# Altium PCB psu_temp.PcbDoc
Units mm, origin at the board's own origin, x right, y up, seen from the top; angles counter-clockwise.
Board outline 150 x 100 mm, 4 copper layers (Top Layer, GND, Power, Bottom Layer), stack 1.57 mm thick; 12 components, 182 nets, 28 pads, 0 vias.
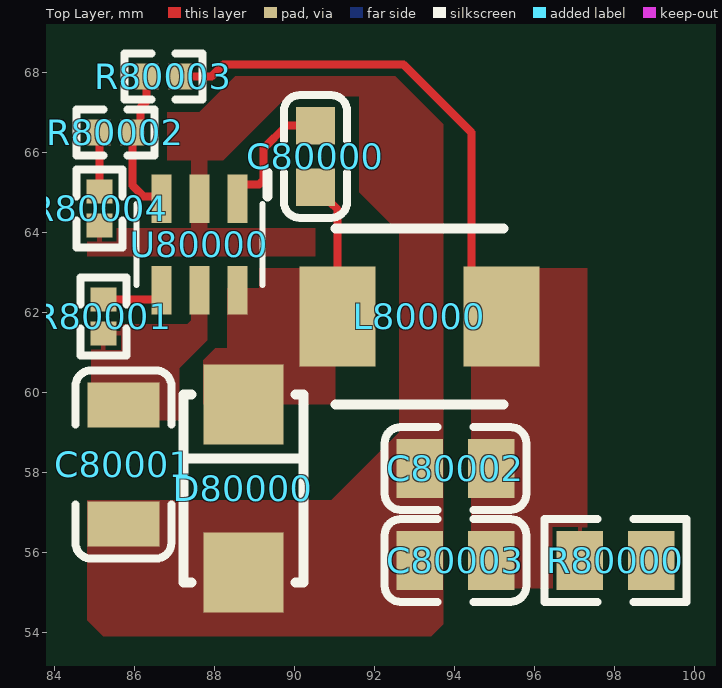
[diagram p0: Top Layer view]
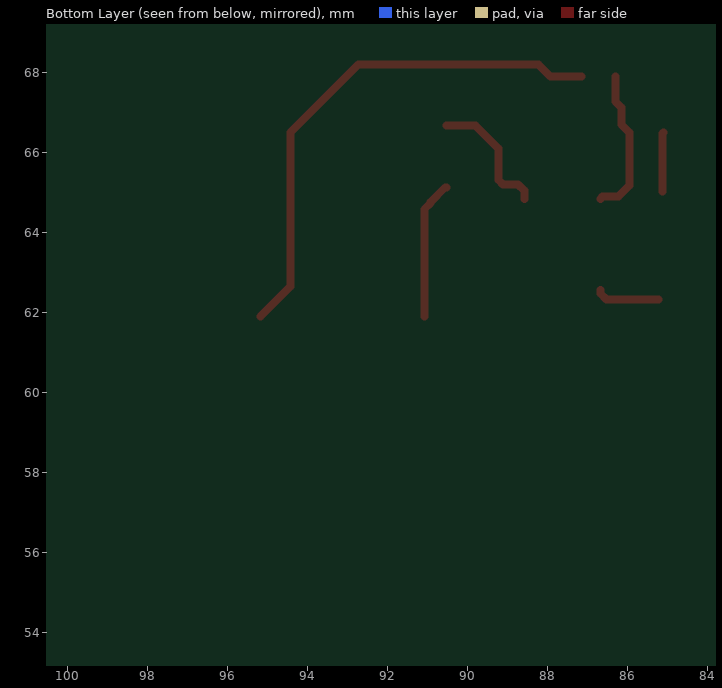
[diagram p1: Bottom Layer view, seen from below]
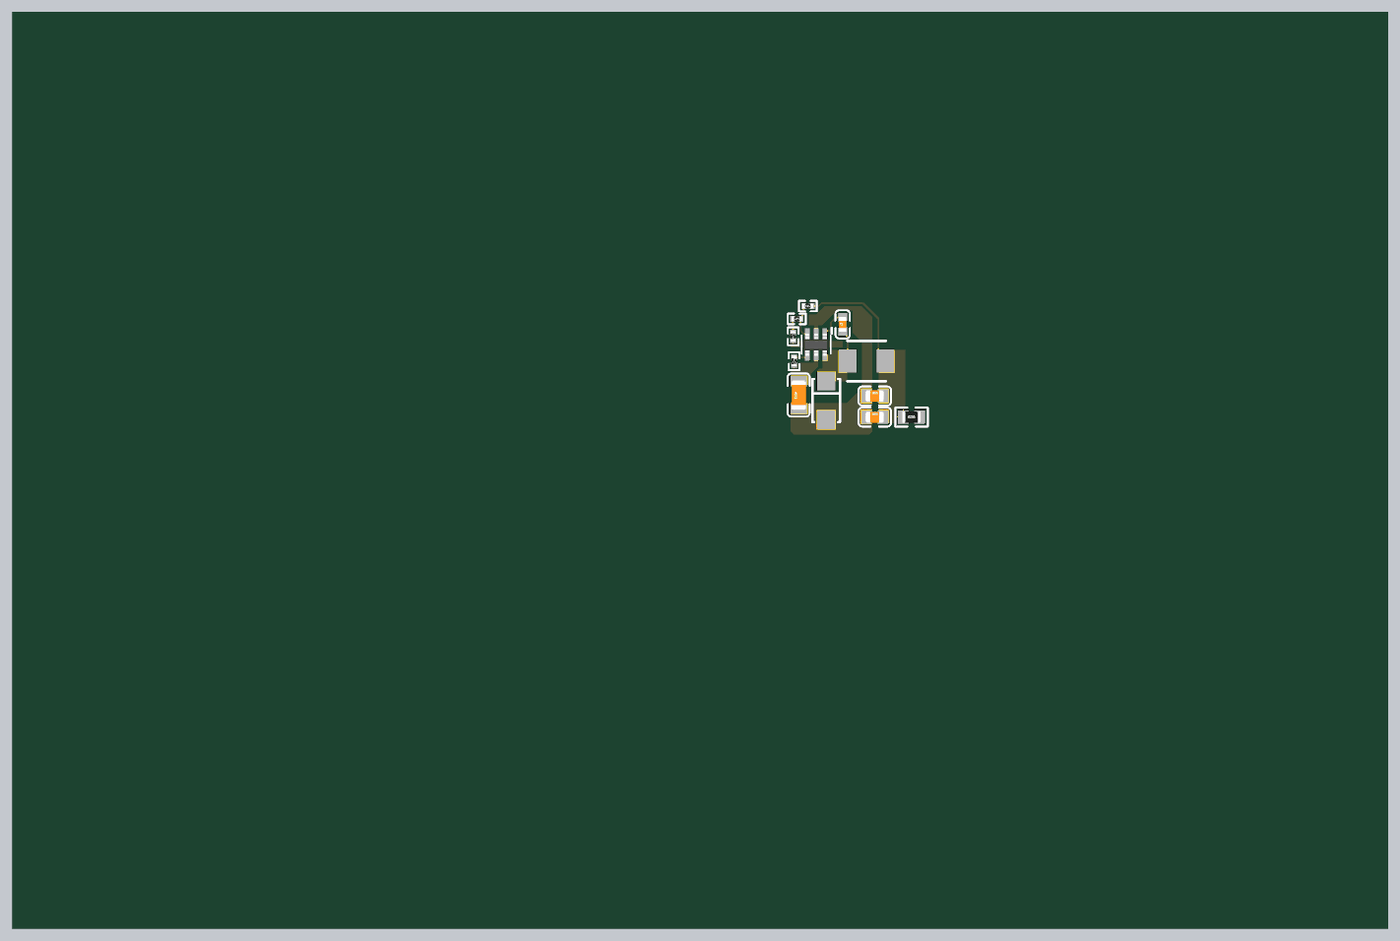
[diagram p2: 3D render of the assembled board from above, using the file's embedded part models]

## Layer stack, top to bottom
Top Solder: solder mask 0.0127, Solder Resist, Dk 3.8
Top Layer: signal copper 0.035
Dielectric 1: prepreg 0.1, 2313, Dk 4.05
GND: signal copper 0.0175
Core: core 1.265, FR-4, Dk 4.5
Power: signal copper 0.0175
Dielectric 2: prepreg 0.1, 2313, Dk 4.05
Bottom Layer: signal copper 0.035
Bottom Solder: solder mask 0.0127, Solder Resist, Dk 3.8

## Board outline
0,0 150,0 150,100 0,100

## Design rules (kind name [scope] priority, off if disabled: settings)
BoardOutlineClearance [All] p1: gap=0.2 ignorepadtopadclearanceinfootprint=FALSE
Clearance [All] p1: gap=0.102 ignorepadtopadclearanceinfootprint=FALSE except(0.127: Arc-Via Track-Via SMDPad-Via THPad-Via Via-Via Via-Fill Via-Poly Via-Region Via-Text; 0.25: Arc-Hole Track-Hole SMDPad-Hole THPad-Hole Via-Hole Fill-Hole Poly-Hole Region-Hole Text-Hole)
ComponentClearance [All] p1: gap=0.102 collisioncheckmode=3 verticalgap=0.102 showdistances=TRUE
DiffPairsRouting [All] p1: maxlimit=0.102 minlimit=0.102 mostfreqgap=0.102 toplayer_minwidth=0.102 toplayer_maxwidth=1816.048 toplayer_prefwidth=0.102 midlayer1_minwidth=0.102 midlayer1_maxwidth=1816.048 midlayer1_prefwidth=0.102 midlayer2_minwidth=0.102 midlayer2_maxwidth=1816.048 midlayer2_prefwidth=0.102 bottomlayer_minwidth=0.102 bottomlayer_maxwidth=1816.048 bottomlayer_prefwidth=0.102 maxuncoupledlength=12.7
Height [All] p1: minheight=0 maxheight=1816.048 prefheight=12.7
HoleSize [All] p1: absolutevalues=TRUE maxlimit=6.3 minlimit=0.2 maxpercent=80.000 minpercent=20.000
HoleToHoleClearance [All] p1: gap=0.25 allowstackedmicrovias=FALSE
MinimumAnnularRing [All] p1: minimumring=0.076
MinimumSolderMaskSliver [All] p1: minsoldermaskwidth=0
PlaneClearance [All] p1: clearance=0.102
PlaneConnect PlaneConnectPowerPads [InPadClass('PowerPads')] p1: planeconnectstyle=Direct reliefexpansion=0.508 reliefentries=4 reliefconductorwidth=0.254 reliefairgap=0.254
PlaneConnect [All] p2: pad.planeconnectstyle=Relief pad.reliefexpansion=0.3 pad.reliefentries=4 pad.reliefconductorwidth=0.102 pad.reliefairgap=0.102 via.planeconnectstyle=Direct via.reliefexpansion=0.3 via.reliefentries=4 via.reliefconductorwidth=0.127 via.reliefairgap=0.127
PolygonConnect PolygonConnectPowerPads [All vs (InPadClass('PowerPads'))] p1: connectstyle=Direct reliefconductorwidth=0.254 reliefentries=4 polygonreliefangle="90 Angle" airgapwidth=0.254
PolygonConnect [All] p2: thpad.connectstyle=Relief thpad.reliefconductorwidth=0.102 thpad.reliefentries=4 thpad.polygonreliefangle="90 Angle" thpad.airgapwidth=0.102 smdpad.connectstyle=Relief smdpad.reliefconductorwidth=0.102 smdpad.reliefentries=4 smdpad.polygonreliefangle="90 Angle" smdpad.airgapwidth=0.102 via.connectstyle=Direct via.reliefconductorwidth=0.127 via.reliefentries=4 via.polygonreliefangle="90 Angle" via.airgapwidth=0.127
RoutingVias [All] p1: holewidth=0.2 width=0.45 viastyle="Through Hole" minholewidth=0.2 minwidth=0.45 maxholewidth=6.3 maxwidth=6.55
SilkToSilkClearance [All] p1: silktosilkclearance=0
SilkToSolderMaskClearance [IsPad] p1: minsilkscreentomaskgap=0.102 clearancetoexposedcopper=TRUE
SolderMaskExpansion [All] p1: expansion=0.075 istentingtop=FALSE
Width [All] p1: maxlimit=1816.048 minlimit=0.102 preferedwidth=0.102
20 further rules are at their usual default settings.

## Classes and differential pairs
pad class PowerPads: C80001-1 C80001-2 C80002-1 C80002-2 C80003-1 C80003-2 D80000-1 D80000-2 L80000-1 L80000-2 U80000-2 U80000-5 U80000-6
component class "[10] - Isolation": U2

## Components (designator, comment, footprint, x,y, rotation, side; value= is the part's Value field where it differs from the comment)
C80000 "100nF (104) 10% 50V" 0603_C 90.525,65.9 r90 top
C80001 "4.7uF (475) 10% 50V" 1206_C 85.725,58.2 r90 top
C80002 "10uF (106) 10% 25V" 0805_C 94.025,58.1 r0 top
C80003 "10uF (106) 10% 25V" 0805_C 94.025,55.8 r0 top
D80000 "SS54" SMA(DO-214AC)_S1 88.725,57.6 r270 top
L80000 "MWSA0518S-6R8MT" MWSA0518 93.125,61.9 r0 top value=6.8uH
R80000 "0Ω (0R0) ±1%" 0805_R 98.025,55.8 r0 top
R80001 "100KΩ (1003) ±1%" 0402_R 85.225,61.9 r270 top
R80002 "3.3KΩ (3301) ±1%" 0402_R 85.525,66.5 r180 top
R80003 "49.9KΩ (4992) ±1%" 0402_R 86.725,67.9 r0 top
R80004 "100KΩ (1003) ±1%" 0402_R 85.125,64.6 r90 top
U80000 "STEP-DOWN CONVERTER" *TSOT-23_S6 87.625,63.7 r270 top

## Footprints (in the part's own frame and the unit in brackets; to place one, negate y for a bottom-side part, rotate by r counter-clockwise, add the part's x,y. Pads: shape width x height; smd on the part's side, far side on the other; paste and mask are expansions set on the pad)
0402_R [mm]
  rect 0.6x0.65 smd mask+0.051: 1(-0.425,0) 2(0.425,0)
  silkscreen extent -0.97,-0.58 0.97,0.58, body extent -0.57,-0.27 0.58,0.28, height 0.41
0603_C [mm]
  rect 0.93x0.98 smd: 1(-0.77,0) 2(0.77,0)
  silkscreen extent -1.53,-0.79 1.54,0.79, body extent -0.8,-0.4 0.8,0.4, height 0.3
0805_C [mm]
  rect 1.16x1.47 smd: 1(-0.89,0) 2(0.89,0)
  silkscreen extent -1.77,-1.04 1.77,1.04, body extent -1,-0.62 1,0.63, height 0.77
0805_R [mm]
  rect 1.16x1.47 smd: 1(-0.89,0) 2(0.89,0)
  silkscreen extent -1.77,-1.04 1.77,1.03, body extent -1,-0.62 1,0.63, height 0.49
1206_C [mm]
  rect 1.13x1.8 smd: 1(-1.49,0) 2(1.49,0)
  silkscreen extent -2.36,-1.2 2.35,1.2, body extent -1.6,-0.81 1.6,0.79, height 1
*TSOT-23_S6 [mil]
  rect 48x20 smd: 1(-45,37.4) 2(-45,0) 3(-45,-37.4) 4(45,-37.4) 5(45,0) 6(45,37.4)
  silkscreen extent -71,-62 40,67, body extent -47,-55 48,55, height 43
MWSA0518 [mm]
  rect 1.9x2.5 smd: 1(-2.05,0) 2(2.05,0)
  silkscreen extent -2.1,-2.2 2.1,2.2, body extent -2.1,-2.2 2.1,2.2, height 1.8
SMA(DO-214AC)_S1 [mm]
  rect 2x2 smd: 1(2.1,0) 2(-2.1,0)
  silkscreen extent -2.35,-1.5 2.35,1.5

## Part data
C80000: library part "0603 100nF (104) 10% 50V", "贴片电容", Package=0603, SuppliersPartNumber=C14663, ComponentLink1Description=供应商链接, ComponentLink1URL=http://www.szlcsc.com/product/details_15331.html, Supplier=LC
C80001: library part "1206 4.7uF (475) 10% 50V", "贴片电容", Package=1206, SuppliersPartNumber=C29823, ComponentLink1Description=供应商链接, ComponentLink1URL=http://www.szlcsc.com/product/details_30577.html, Supplier=LC
C80002 C80003: library part "0805 10uF (106) 10% 25V", "贴片电容", Package=0805, SuppliersPartNumber=C15850, ComponentLink1Description=供应商链接, ComponentLink1URL=http://www.szlcsc.com/product/details_16532.html, Supplier=LC
D80000: library part "SMA(DO-214AC) SS54", "二极管", Package=SMA(DO-214AC), SuppliersPartNumber=C22452, ComponentLink1Description=供应商链接, ComponentLink1URL=http://www.szlcsc.com/product/details_23178.html, Supplier=LC
L80000: "POWER INDUCTORS SMD,5.2X5.4X1.8MM ROHS", Current Rating=5.0A, Package=5.2X5.4X1.8MM, SuppliersPartNumber=C408348, Supplier=LC
R80000: library part "0805 0Ω (0R0) 1%", "贴片电阻", Package=0805, SuppliersPartNumber=C17477, ComponentLink1Description=供应商链接, ComponentLink1URL=http://www.szlcsc.com/product/details_18165.html, Supplier=LC
R80001 R80004: library part "0402 100KΩ (1003) 1%", "贴片电阻", Package=0402, SuppliersPartNumber=C25741, ComponentLink1Description=供应商链接, ComponentLink1URL=http://www.szlcsc.com/product/details_26484.html, Supplier=LC
R80002: library part "0402 3.3KΩ (3301) 1%", "贴片电阻", Package=0402, SuppliersPartNumber=C25890, ComponentLink1Description=供应商链接, ComponentLink1URL=http://www.szlcsc.com/product/details_26633.html, Supplier=LC
R80003: library part "0402 49.9KΩ (4992) 1%", "贴片电阻", Package=0402, SuppliersPartNumber=C25897, ComponentLink1Description=供应商链接, ComponentLink1URL=http://www.szlcsc.com/product/details_26640.html, Supplier=LC
U80000: library part MP2359, "1.2A, 24V, 1.4MHz STEP-DOWN CONVERTER IN A TSOT23-6", SuppliersPartNumber=C14259

## Nets (pads, with @x,y where several pads share a name; then routed paths per layer and width w, separated by ;. In a path a pad name is that pad's centre, name@x,y a point inside that pad or via, vN(x,y) a via of type N, cw(c..) or ccw(c..) an arc to the next point about the centre after c; other vN are vias at no path point)
+1.2V: R80000.2
+3V3A: 
+3V3A_ISO: 
+3V3D: 
+3V3D_ISO: 
+VREF: 
+Vsup: C80001.2 R80001.2 U80000.5
ACT_LED: 
ADC-VCM: 
ARM_nRESET: 
FL_CLK: 
FL_MISO: 
FL_MOSI: 
FL_nCS: 
FPGA_Config_CCLK: 
FPGA_Config_INIT_B: 
FPGA_Config_M0: 
FPGA_Config_M1: 
GND: C80001.1 C80002.1 C80003.1 D80000.1 R80004.1 U80000.2
GND_ISO: 
GPS_PPS_Out: 
GPS_Serial_RX: 
GPS_Serial_TX: 
INPUT_V+: 
Line-L1: 
Line-L2: 
Line-L3: 
Line-Neu: 
LNK_LED: 
NetC100_2: 
NetC300_2: 
NetC301_2: 
NetC302_2: 
NetC303_2: 
NetC400_2: 
NetC401_1: 
NetC402_2: 
NetC403_1: 
NetC404_2: 
NetC405_1: 
NetC406_2: 
NetC407_1: 
NetC505_2: 
NetC512_2: 
NetC515_2: 
NetC516_1: 
NetC600_1: 
NetC600_2: 
NetC602_2: 
NetC808_2: 
NetC809_2: 
NetC810_1: 
NetC811_1: 
NetC814_1: 
NetC909_2: 
NetC911_2: 
NetC912_2: 
NetC913_2: 
NetC914_2: 
NetC915_2: 
NetC916_2: 
NetC917_2: 
NetC80000_1: C80000.1 D80000.2 L80000.1 U80000.6 | length 3.5
  Top Layer w0.2: C80000.1 90.55,65.13 90.915,64.765 90.915,64.74 91.075,64.58 L80000.1
NetC80000_2: C80000.2 U80000.1 | length 3.3
  Top Layer w0.2: U80000.1 88.575,65.046 88.729,65.2 89.108,65.2 89.225,65.317 89.225,66.1 89.795,66.67 C80000.2
NetC80002_2: C80002.2 C80003.2 L80000.2 R80000.1 R80003.2 | length 13
  Top Layer w0.2: R80003.2 87.925,67.9 88.225,68.2 92.725,68.2 94.425,66.5 94.425,62.65 L80000.2
NetD100_1: 
NetD100_2: 
NetD400_1: 
NetD400_2: 
NetD401_1: 
NetD401_2: 
NetD402_1: 
NetD402_2: 
NetD403_1: 
NetD403_2: 
NetD800_A: 
NetD801_A: 
NetD802_A: 
NetD803_A: 
NetJ900_10: 
NetJ900_12: 
NetR101_1: 
NetR102_1: 
NetR103_2: 
NetR104_2: 
NetR300_2: 
NetR303_2: 
NetR306_2: 
NetR309_2: 
NetR500_1: 
NetR501_1: 
NetR502_1: 
NetR503_2: 
NetR504_1: 
NetR504_2: 
NetR505_2: 
NetR506_2: 
NetR600_1: 
NetR601_1: 
NetR603_1: 
NetR604_2: 
NetR605_1: 
NetR605_2: 
NetR700_1: 
NetR703_2: 
NetR800_2: 
NetR801_2: 
NetR802_2: 
NetR803_2: 
NetR804_1: 
NetR805_2: 
NetR807_2: 
NetR900_2: 
NetR901_1: 
NetR902_1: 
NetR903_1: 
NetR907_1: 
NetR908_1: 
NetR909_1: 
NetR910_1: 
NetR911_1: 
NetR915_1: 
NetR915_2: 
NetR80001_1: R80001.1 U80000.4 | length 1.6
  Top Layer w0.2: R80001.1 86.521,62.325 86.675,62.479 U80000.4
NetR80002_1: R80002.1 R80003.1 U80000.3 | length 3.7
  Top Layer w0.2: R80003.1 86.3,67.275 86.15,67.125 86.15,66.7 R80002.1 85.95,65.175 86.225,64.9 86.618,64.9 U80000.3
NetR80002_2: R80002.2 R80004.2 | length 1.5
  Top Layer w0.2: R80002.2 85.125,66.475 R80004.2
NetRp500_1: 
NetRp500_2: 
NetRp500_3: 
NetRp500_4: 
NetU100_3: 
NetU100_4: 
NetU100_5: 
NetU100_6: 
NetU100_12: 
NetU100_13: 
NetU100_14: 
NetU101_12: 
NetU101_13: 
NetU101_14: 
NetU500_2: 
NetU500_4: 
NetU500_10: 
NetU500_12: 
NetU500_18: 
NetU500_19: 
NetU500_20: 
NetU500_21: 
NetU500_25: 
NetU500_26: 
NetU500_27: 
NetU500_28: 
NetU500_29: 
NetU500_30: 
NetU500_32: 
NetU500_36: 
NetU500_37: 
NetU500_38: 
NetU500_39: 
NetU500_40: 
NetU500_45: 
NetU500_46: 
NetU500_47: 
NetU500_48: 
NetU500_57: 
NetU600_39: 
NetU600_65: 
NetU600_70: 
NetU900_34: 
RXN: 
RXP: 
SWCLK: 
SWDIO: 
SWO: 
SYS_CLK: 
TCK: 
TDI: 
TDO: 
TMS: 
TXN: 
TXP: 
VIN_FUSE: 

## Polygon pours and split planes (outlines as drawn)
GND on Top Layer "GND_L01_P001" (solid, pour order 1): 84.825,57.3 90.925,57.3 92.625,59 92.625,64 91.625,65 91.625,67.4 89.825,67.4 88.225,65.8 87.825,65.8 87.825,65.1 87.525,65.1 87.425,65.2 87.425,65.8 86.825,65.8 86.825,67 87.625,67 88.525,67.9 92.525,67.9 93.725,66.7 93.725,54.2 93.425,53.9 85.225,53.9 84.825,54.3
NetC80000_1 on Top Layer "NETC80000_1_L01_P000" (solid, pour order 0): 88.325,62.6 89.125,62.6 89.125,63.1 91.025,63.1 91.025,59.7 87.725,59.7 87.725,60.8 88.025,61.1 88.325,61.1
NetC80002_2 on Top Layer "NETC80002_2_L01_P002" (solid, pour order 2): 94.425,63.1 94.425,55.1 97.325,55.1 97.325,63.1
+Vsup on Top Layer "+VSUP_L01_P004" (solid, pour order 4): 85.225,61.475 85.45,61.7 87.325,61.7 87.425,61.8 87.425,62.2 87.825,62.2 87.825,61.3 87.125,60.6 87.125,59.3 84.925,59.3 84.925,61.4
GND on Top Layer "GND_L01_P003" (solid, pour order 3): 87.425,64.6 87.425,64.1 85.2,64.1 85.125,64.175 85.05,64.1 84.825,64.1 84.825,63.4 90.525,63.4 90.525,64.1 87.825,64.1 87.825,64.5

## Silkscreen, mask and mechanical layers (free items; w line width, h text height)
Outline:
  the board outline again, w0.254